# Altium PCB dc_power_backup_module_v1.PcbDoc (part 1 of 4)
Units mil, origin at the board's own origin, x right, y up, seen from the top; angles counter-clockwise.
Board outline 3300 x 2890 mil, 2 copper layers (Top Layer, Bottom Layer); 44 components, 21 nets, 171 pads, 32 vias.
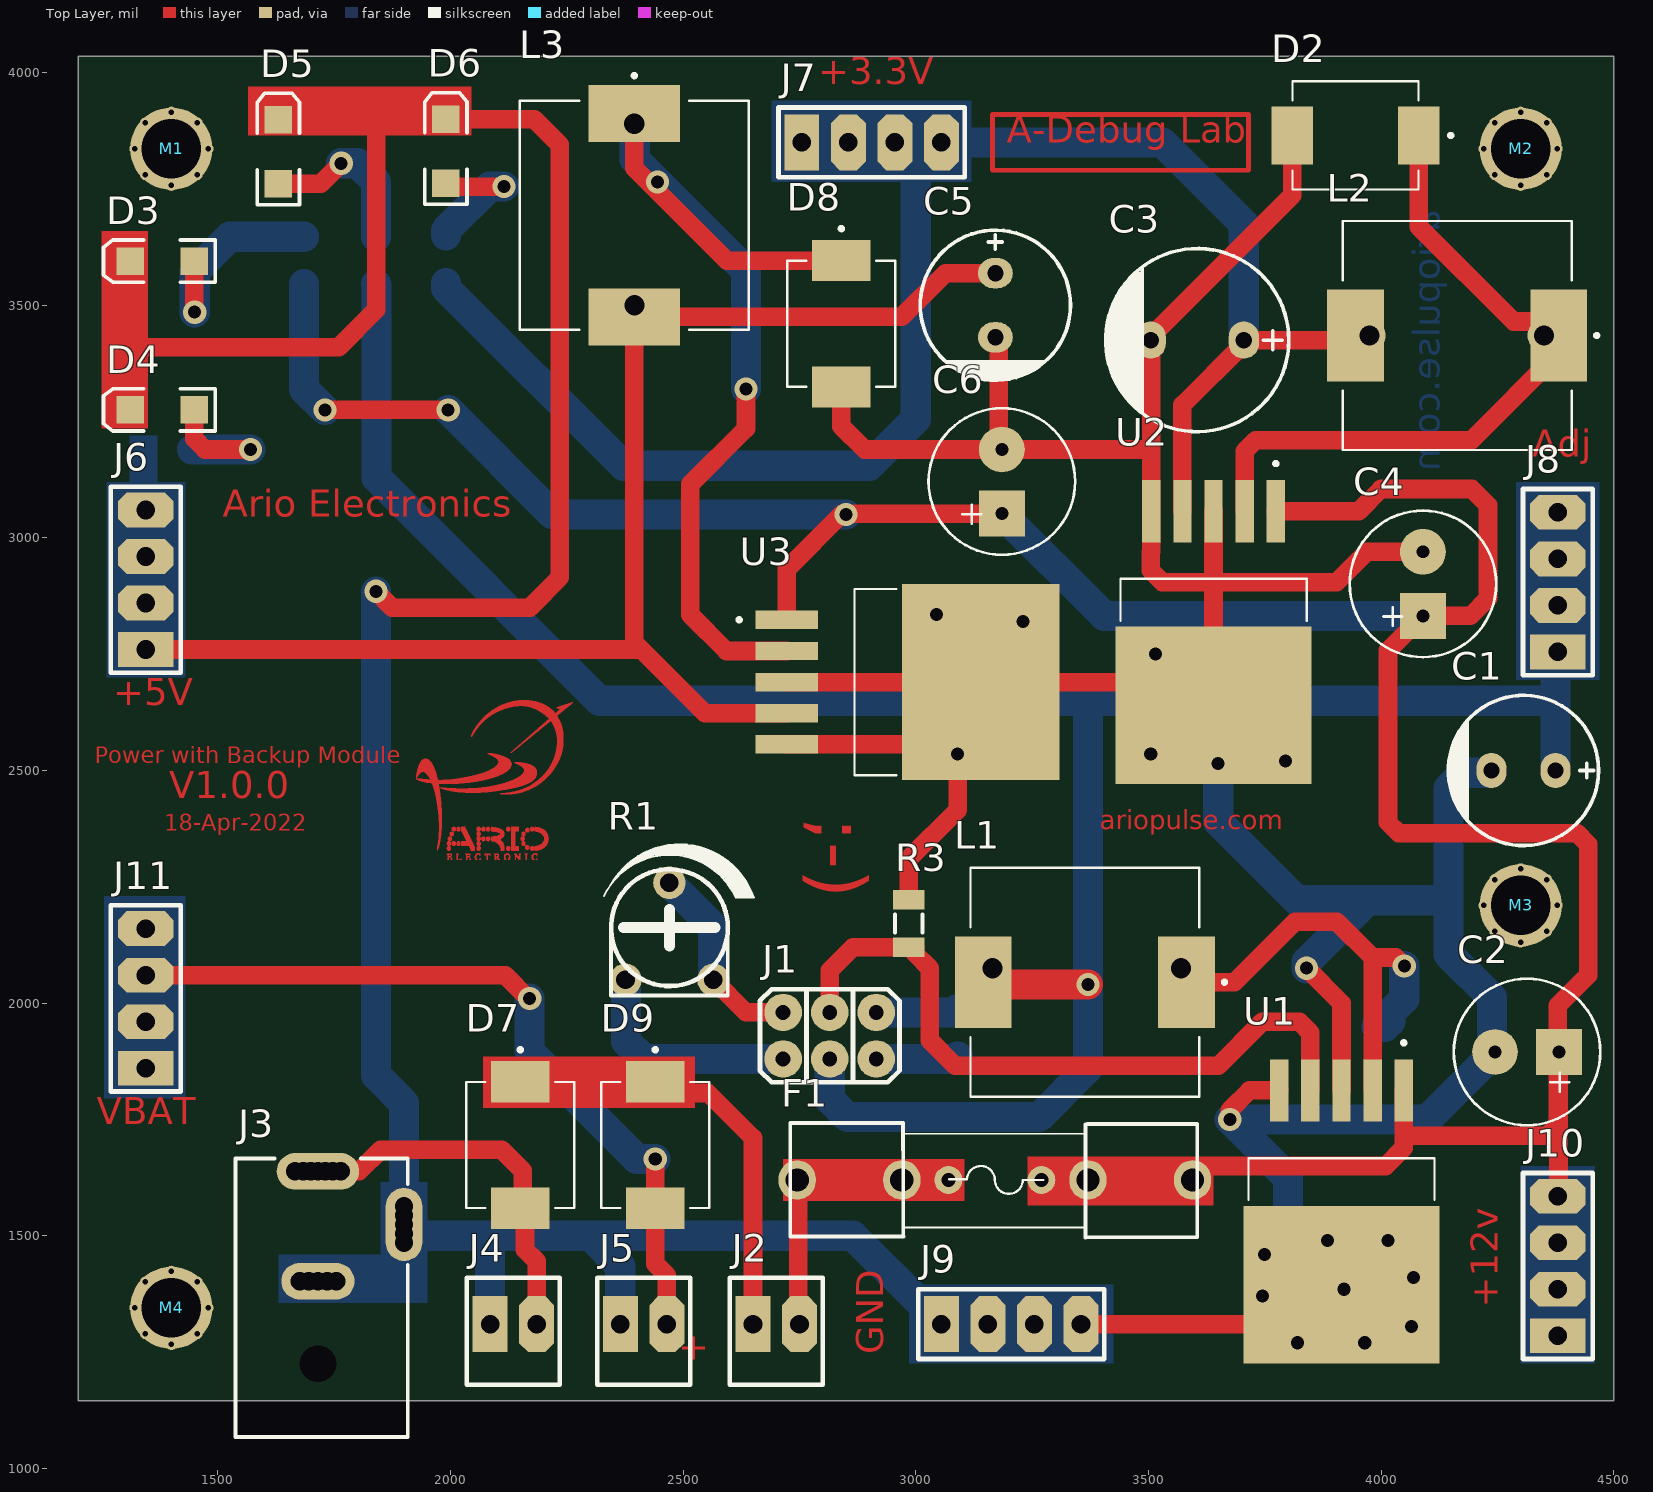
[diagram p0: Top Layer view]
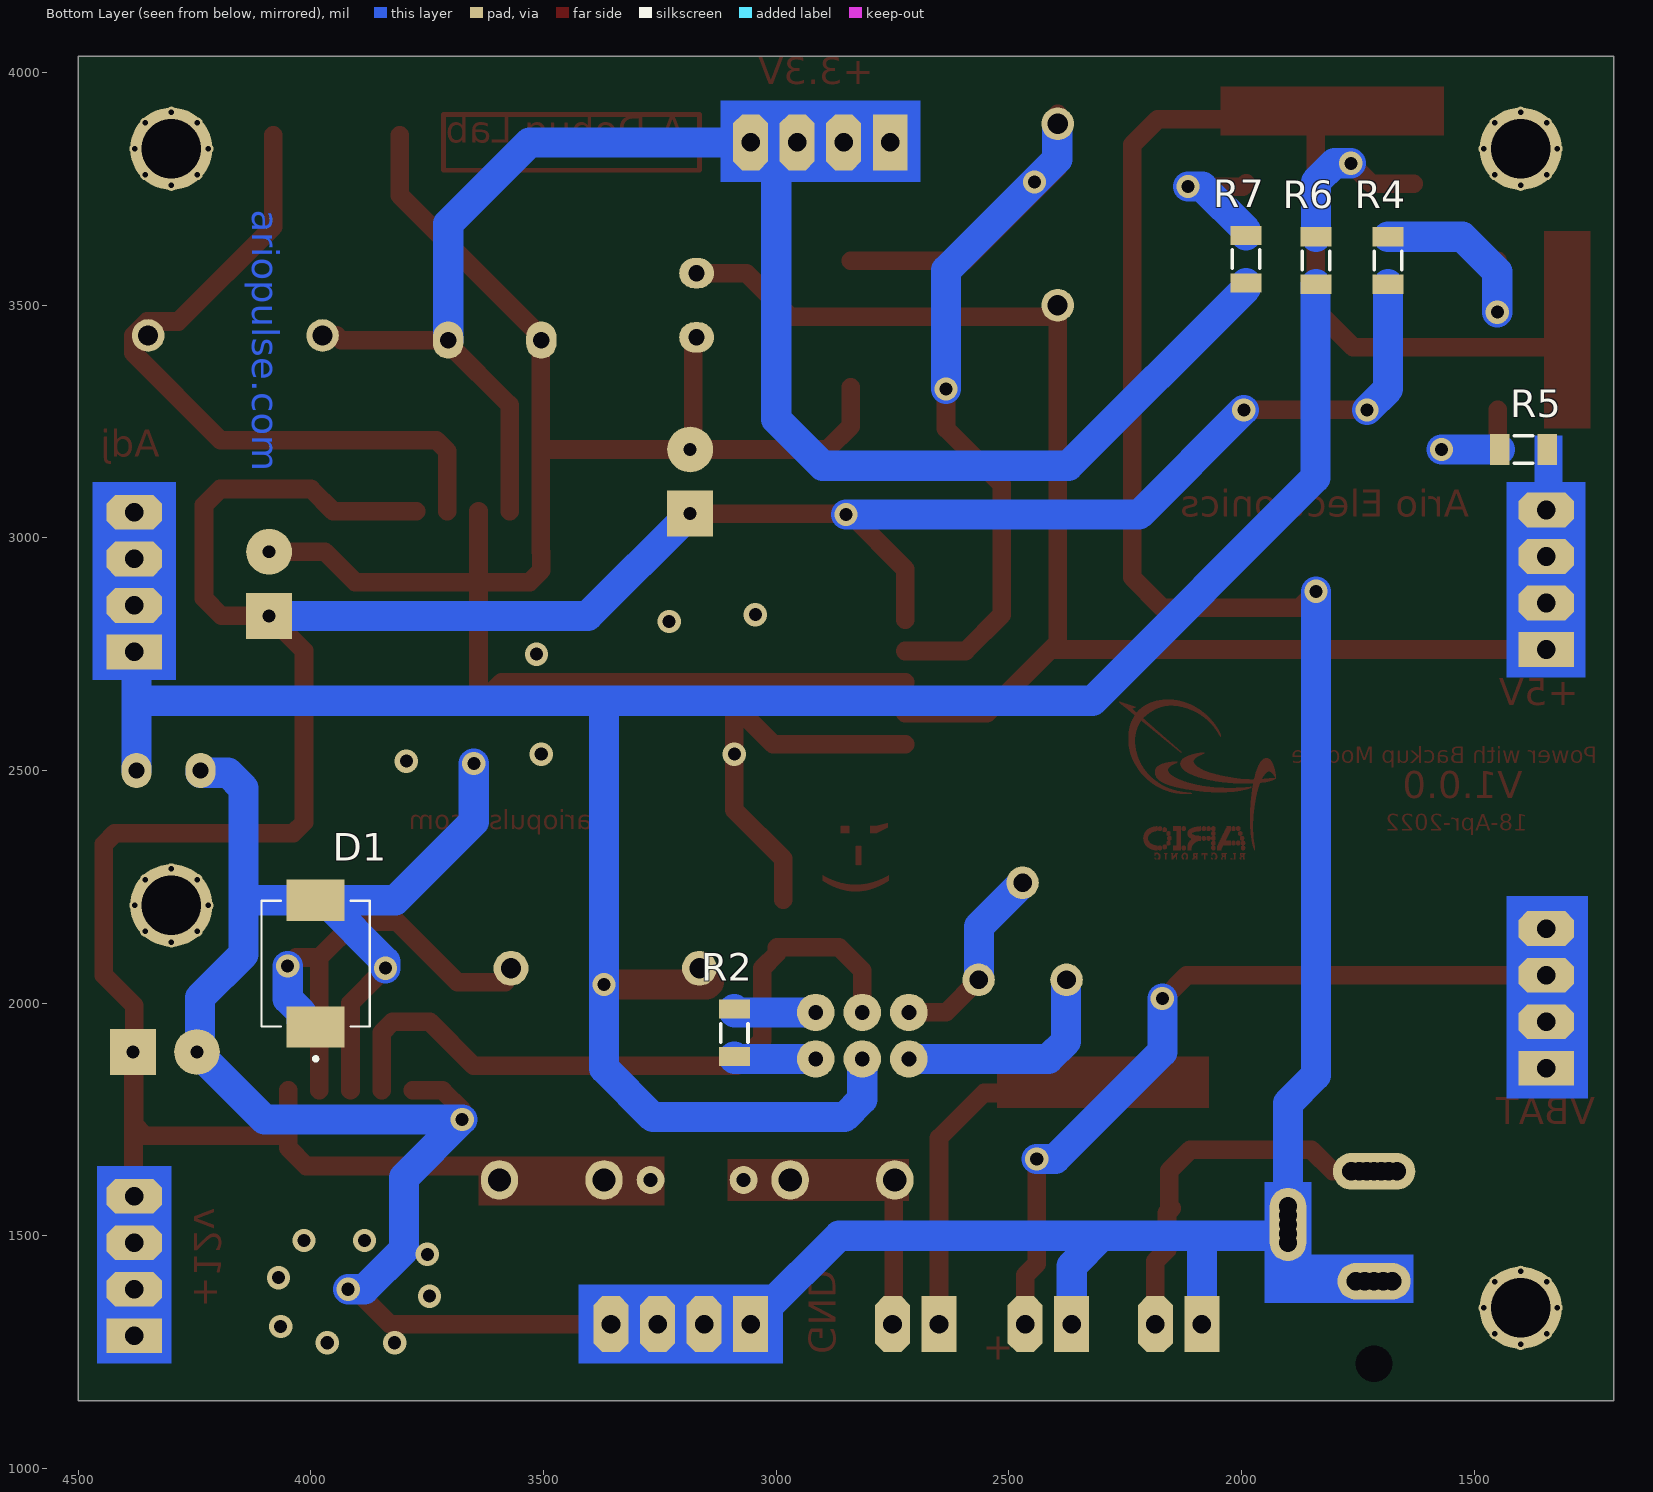
[diagram p1: Bottom Layer view, seen from below]
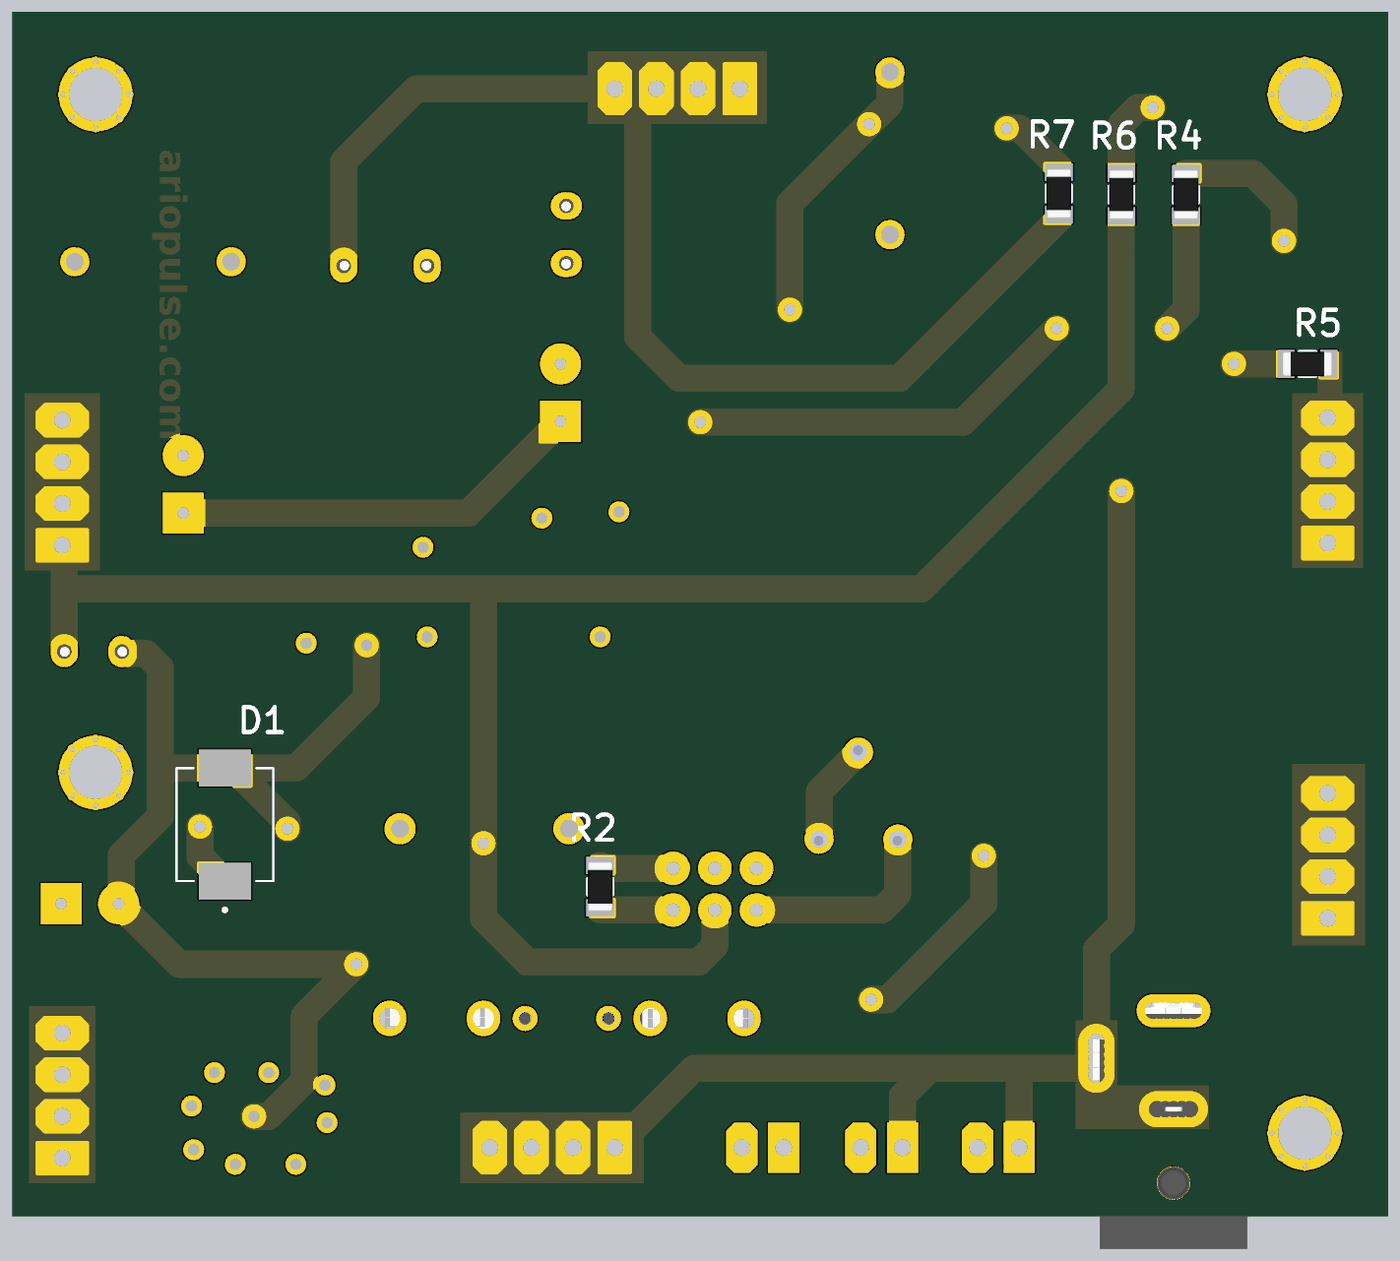
[diagram p5: 3D render of the assembled board from below, using the file's embedded part models]

## Layer stack, top to bottom
Top Solder: solder mask 0.4, Solder Resist, Dk 3.5
Top Layer: signal copper 1.4
Dielectric 1: dielectric 12.6, FR-4, Dk 4.8
Bottom Layer: signal copper 1.4
Bottom Solder: solder mask 0.4, Solder Resist, Dk 3.5

## Board outline
1200,1145 4500,1145 4500,4035 1200,4035

## Design rules (kind name [scope] priority, off if disabled: settings)
Clearance [All] p1: gap=10 ignorepadtopadclearanceinfootprint=FALSE except(0: Arc-Hole Track-Hole SMDPad-Hole THPad-Hole Via-Hole Fill-Hole Poly-Hole Region-Hole Text-Hole)
PolygonConnect [All] p1: connectstyle=Relief reliefconductorwidth=10 reliefentries=4 polygonreliefangle="90 Angle" airgapwidth=10
RoutingVias [All] p1: holewidth=28 width=50 viastyle="Through Hole" minholewidth=28 minwidth=50 maxholewidth=28 maxwidth=50
SolderMaskExpansion [All] p1: expansion=4 istentingtop=FALSE
Width [All] p1: maxlimit=65 minlimit=40 preferedwidth=65 toplayer_prefwidth=40 bottomlayer_minwidth=65 minimp=50.000000 maximp=50.000000 favimp=50.000000
30 further rules are at their usual default settings.

## Components (designator, comment, footprint, x,y, rotation, side; value= is the part's Value field where it differs from the comment)
C1 "Cap Pol2" "Cap 03" 4306.1,2500 r0 top value=680uF
C2 "Cap Pol2" "Cap - 470uF" 4245,1895 r0 top value=100uF
C3 "Cap Pol2" "Cap 04" 3605,3425 r0 top value=1000uF
C4 "Cap Pol2" "Cap - 470uF" 4090,2970 r270 top value=100uF
C5 "Cap Pol2" "Cap 03" 3171.1,3500 r90 top value=680uF
C6 "Cap Pol2" "Cap - 470uF" 3185,3190 r270 top value=100uF
D1 "SS34" DIOM7959X265N 3990,2085 r90 bottom
D2 "SS34" DIOM7959X265N 3945,3865 r180 top
D3 "LED1" "LED SMD 1206" 1380,3595 r180 top
D4 "LED1" "LED SMD 1206" 1380,3275 r180 top
D5 "LED1" "LED SMD 1206" 1630,3830 r90 top
D6 "LED1" "LED SMD 1206" 1990,3831.1 r90 top
D7 "SS34" DIOM7959X265N 2150,1695 r270 top
D8 "SS34" DIOM7959X265N 2840,3460 r270 top
D9 "SS34" DIOM7959X265N 2440,1695 r270 top
F1 "FUSE" "Fuse - Complex" 3170,1620 r0 top
J1 "JUMPER6" JUMP6 2915,1980 r270 top
J2 "KEY" SIP2 2650,1310 r0 top
J3 "DCJ250-10-A_XX-X_REVA" "Power Jack" 1715,1067.52 r90 top
J4 "PowerIn" SIP2 2085,1310 r0 top
J5 "Battery" SIP2 2365,1310 r0 top
J6 "OUT-5v" SIP4 1345,2760 r90 top
J7 "OUT-3.3v" SIP4 2755,3850 r0 top
J8 "OUT-ADJ" SIP4 4380,2755 r90 top
J9 "OUT-GND" SIP4 3055,1310 r0 top
J10 "OUT-12v" SIP4 4380,1285 r90 top
J11 "OUT-BAT" SIP4 1345,1860 r90 top
L1 "68uH" *IND_SRP1265A-330M 3363.5,2045 r180 top
L2 "68uH" *IND_SRP1265A-330M 4163.5,3435 r180 top
L3 "68uH" *IND_SRP1265A-330M 2395,3693.5 r270 top
M1 "Screw" "Board Screw_No Silk" 1400,3836.26 r0 top
M2 "Screw" "Board Screw_No Silk" 4300,3836.26 r0 top
M3 "Screw" "Board Screw_No Silk" 4300,2210 r0 top
M4 "Screw" "Board Screw_No Silk" 1400,1345 r0 top
R1 "POT" "Pot 00" 2470.51,2154.33 r0 top value=50K
R2 "Res-1206" "RES 1206" 3090,1987.2 r270 bottom value=2.7K
R3 "Res-1206" "RES 1206" 2985,2222.2 r270 top value=1.2K
R4 "Res-1206" "RES 1206" 1685,3647.2 r270 bottom value=560
R5 "Res-1206" "RES 1206" 1445,3190 r180 bottom value=220K
R6 "Res-1206" "RES 1206" 1840,3647.2 r270 bottom value=180K
R7 "Res-1206" "RES 1206" 1990,3650 r270 bottom value=100
U1 "LM2576-ADJ" VREG_TPS79625KTTR 3915,1395 r270 top
U2 "LM2576-3.3" VREG_TPS79625KTTR 3640,2640 r270 top
U3 "LM2576-3.3" VREG_TPS79625KTTR 3140,2690 r0 top

## Footprints (in the part's own frame and the unit in brackets; to place one, negate y for a bottom-side part, rotate by r counter-clockwise, add the part's x,y. Pads: shape width x height; smd on the part's side, far side on the other; paste and mask are expansions set on the pad)
*IND_SRP1265A-330M [mm]
  rect 3.1x5 smd: 1(-5.55,0) 2(5.55,0)
  silkscreen extent -7.72,-6.25 6.25,6.25
"Board Screw_No Silk" [mm]
  round 0.6 hole 0.3: S(-2,0) S(-1.414,-1.414) S(-1.414,1.414) S(0,-2) S(0,2) S(1.414,-1.414) S(1.414,1.414) S(2,0)
  round 4.5 hole 3.25 mask+0.1: S(0,0)
"Cap 03" [mil]
  oval 65x75 hole 35: 1(68.9,0) 2(-68.9,0)
  silkscreen extent -161,-161 161,161, body extent -159,-159 157,158, height 473
"Cap 04" [mil]
  oval 65x80 hole 35: 1(100,0) 2(-100,0)
  silkscreen extent -197,-197 197,197, body extent -198,-197 198,199, height 513
"Cap - 470uF" [mm]
  rect 2.5x2.5 hole 0.7: 1(3.5,0)
  round 2.5 hole 0.7: 2(0,0)
  silkscreen extent -2.25,-4 5.75,4
DIOM7959X265N [mm]
  rect 2.25x3.18 smd: A(3.455,0) C(-3.455,0)
  silkscreen extent -5.3,-2.95 3.44,2.95
"Fuse - Complex" [mil]
  oval 80x85 hole 50: 1(-425,0) 1(-200,0) 2(200,0) 2(425,0)
  round 60 hole 30: 1(-100,0) 2(100,0)
  silkscreen extent -440,-124 435,123, body extent -434,-121 436,125, height 378
JUMP6 [mil]
  oval 80x81 hole 32: 1(0,0) 2(100,0) 3(0,-100) 4(100,-100) 5(0,-200) 6(100,-200)
  silkscreen extent -50,-250 150,50
"LED SMD 1206" [mm]
  rect 1.5x1.5 smd: 1(-1.75,0) 2(1.75,0)
  silkscreen extent -2.9,-1.15 3.2,1.15, body extent -1.65,-0.76 1.65,0.69, height 1.36
"Pot 00" [mil]
  round 70 hole 40: 1(-94.49,-104.33) 2(94.49,-104.33) 3(0,104.33)
  silkscreen extent -141,-138 181,187, body extent -125,-144 127,145, height 183
"Power Jack" [mm] "Power Adaptor Jack"
  round 1.5 hole 1: 1(14.5,-1.25) 1(14.5,-0.8) 1(14.5,-0.4) 1(14.5,0.4) 1(14.5,0.8) 1(14.5,1.25) 2(8.5,-1) 2(8.5,1) 2(8.5,-0.5) 2(8.5,0.5) 3(10.6,-4.7) 3(11.1,-4.7) 3(12.1,-4.7) 3(12.6,-4.7)
  oval 2x4.5 hole 1: 1(14.5,0)
  oval 2x4 hole 1: 2(8.5,0)
  oval 4x2 hole 1: 3(11.6,-4.7)
  round 1.9 hole 2: MH(4,0)
  silkscreen extent 0,-4.9 15.2,4.5, body extent 0,-4.9 15.2,4.5, height 11
"RES 1206" [mm] "Chip Resistor, 2-Leads, Body 3.2x1.6mm, IPC High Density _ (0.125 W)"
  rect 1.05x1.7 smd: 1(0,0) 2(2.596,0)
  silkscreen extent 0.8,-0.75 1.8,0.75, body extent -0.23,-0.76 2.82,0.76, height 0.6
SIP2 [mil]
  rect 75x120 hole 40: 1(0,0)
  oct 75x120 hole 40: 2(100,0)
  silkscreen extent -50,-130 150,100
SIP4 [mil]
  rect 75x120 hole 40: 1(0,0)
  oct 75x120 hole 40: 2(100,0) 3(200,0) 4(300,0)
  silkscreen extent -50,-75 350,75
VREG_TPS79625KTTR [mm]
  rect 3.4x1 smd paste-3 mask+0: 1(-10.6,3.4) 2(-10.6,1.7) 3(-10.6,0) 4(-10.6,-1.7) 5(-10.6,-3.4)
  rect 8.6x10.7 smd paste-6 mask+0: 6(0,0)
  silkscreen extent -13.3,-5.08 -4.62,5.08

## Part data
C1 C2 C3 C4 C5 C6: "Polarized Capacitor (Axial)", LatestRevisionDate=17-Jul-2002, LatestRevisionNote="Re-released for DXP Platform.", PackageDescription="Polarized Capacitor; 2 Leads", PackageReference=POLAR0.8, Published=8-Jun-2000, Publisher="Altium Limited"
D1 D2 D7 D8 D9: library part SS34-E3/57T, "Diode Schottky 40V 3A Surface Mount DO-214AB _SMC_", Package="DO-214 Vishay", Availability=Unavailable, MF=Vishay, MP=SS34-E3/57T, Price=None, SnapEDA_Link=https://www.snapeda.com/parts/SS34-E3/57T/Vishay%20Semiconductor%20Diodes%20Division/view-part/104253/?ref=snap
D3 D4 D5 D6: "Typical RED GaAs LED", LatestRevisionDate=08-Jul-2005, LatestRevisionNote="Mech Layer 1 removed.", PackageDescription="LED; 2 Leads", PackageReference=LED-1, Published=8-Jun-2000, Publisher="Altium Limited"
J1: "Ju,per & dip Switch"
J2 J4 J5: library part 2PIN
J3: "Power Barrel Connector Jack 2.55mm ID _0.100_, 5.50mm OD _0.217_ Through Hole, Right Angle", Package=None, Availability=Unavailable, MF="Global Connector Technology", MP=DCJ250-10-A-K1-K, Price=None, SnapEDA_Link=https://www.snapeda.com/parts/DCJ250-10-A-K1-K/Global%20Connector%20Technology/view-part/813036/?ref=snap
J6 J7 J8 J9 J10 J11: library part 4PIN
L1 L2 L3: library part SRP1265A-330M, "Inductor Power Shielded Wirewound 33uH 20% 100KHz Carbonyl Powder 8A 58mOhm DCR Automotive T/R", Package="1008 Bourns", Availability=Unavailable, MF=Bourns, MP=SRP1265A-330M, Price=None, SnapEDA_Link=https://www.snapeda.com/parts/SRP1265A-330M/Bourns/view-part/?ref=snap
M1 M2 M3 M4: library part "Board Screw", "Board Screw With Spacer"
R1: library part RPot, "Volume Potentiometer", LatestRevisionDate=17-Jul-2002, LatestRevisionNote="Re-released for DXP Platform.", PackageDescription="Variable Resistor, Thru-Hole; 3 Leads", PackageReference=VR5, Published=8-Jun-2000, Publisher="Altium Limited", Set Position=0.5, Sim Note="Enter the Resistance value and the set point into parameter fields."
R2 R3 R4 R5 R6 R7: "Resistor", LatestRevisionDate=17-Jul-2002, LatestRevisionNote="Re-released for DXP Platform.", PackageDescription="Axial Device, Thru-Hole; 2 Leads; 0.3 in Pin Spacing", PackageReference=AXIAL-0.3, Published=8-Jun-2000, Publisher="Altium Limited"
U1 U2 U3: library part LM2576HVS-ADJ/NOPB, "SWITCHER Ø³Ø§Ø¯Ù‡ Ùˆ regØ› ØªÙ†Ø¸ÛŒÙ… Ú©Ù†Ù†Ø¯Ù‡ Ú¯Ø§Ù… Ø¨Ù‡ Ù¾Ø§ÛŒÛŒÙ† ØªØ¹Ø¯Ø§Ø¯ 4 ÙˆÙ„Øª ØªØ§ 60 ÙˆÙ„Øª ØŒ 3A Ú©Ù… Ú©Ø§Ù…Ù¾ÙˆÙ†Ù†Øª 5-DDPAK / TO-263 -40 ØªØ§ 125", Package="TO-263-5 Texas Instruments", Availability=Unavailable, BuyPart=https://www.snapeda.com/parts/LM2576HVS-ADJ/NOPB/Texas%20Instruments/view-part/213619/?ref=eda, MF="Texas Instruments", MP=LM2576HVS-ADJ/NOPB, Price=None, SnapEDA_Link=https://www.snapeda.com/parts/LM2576HVS-ADJ/NOPB/Texas%20Instruments/view-part/213619/?ref=snap, Texas_Instruments-Purchase-URL=https://snapeda.com/shop?store=Texas+Instruments&id=213619

## Free pads (board coordinates)
  round 75 hole 43.31: 8(3165,2075) 9(3570,2075)
  round 70 hole 43.2: 10(2395,3500) 12(3975,3435) 13(4350,3435)
  round 70 hole 43.31: 11(2395,3890)

## Via types
v1: diameter 50, hole 28, Top Layer to Bottom Layer, 32 vias

## Nets (pads, with @x,y where several pads share a name; then routed paths per layer and width w, separated by ;. In a path a pad name is that pad's centre, name@x,y a point inside that pad or via, vN(x,y) a via of type N, cw(c..) or ccw(c..) an arc to the next point about the centre after c; other vN are vias at no path point)
+3.3V: C3.1 J7.1 J7.2 J7.3 J7.4 L2.2 pad.12 R7.2 U2.4 | length 3399.4
  Top Layer w40: U2.4@3573.07,3057.32 3573.07,3285.57 3705,3417.5 C3.1@3705,3425 3935,3425 L2.2@3945,3435
  Bottom Layer w65: R7.2@1990,3547.8 1990,3536.93 2371.93,3155 2900,3155 3000,3255 3000,3795 ; J7.4@3055,3850 3530,3850 3705,3675 C3.1@3705,3425
+5V: C5.1 J6.1 J6.2 J6.3 J6.4 L3.2 pad.10 R5.2 U3.4 | length 2970.6
  Top Layer w40: J6.1@1345,2760 2410,2760 ; U3.4@2722.68,2623.07 2546.93,2623.07 2410,2760 ; C5.1@3171.1,3568.9 3063.9,3568.9 2970,3475 L3.2@2395,3475 2395,2775 2410,2760
+12V: C2.1 C4.1 C6.1 F1.2 J10.1 J10.2 J10.3 J10.4 R4.2 U1.1 U2.1 U3.1 | length 6734.4
  Top Layer w40: v1(1730,3275) v1(1995,3275) ; U3.1@2722.68,2823.86 2722.68,2932.68 2842.2,3052.2 C6.1@3185,3052.2 ; 3625,1650 4010,1650 4048.86,1688.86 4048.86,1715 ; U2.1@3773.86,3057.32 3952.32,3057.32 4000,3105 4195,3105 4230,3070 4230,2870 4192.2,2832.2 C4.1@4090,2832.2 4015,2757.2 4015,2388.43 4038.43,2365 4421.57,2365 4445,2341.57 4445,2060 4380,1995 C2.1@4380,1892.2 ; U1.1@4048.86,1812.32 4048.86,1715 ; J10.4@4380,1585 4381.4,1586.4 4381.4,1893.6 C2.1@4380,1892.2 ; 4048.86,1715 4356.57,1715 4380,1738.43 C2.1@4380,1892.2
  Bottom Layer w65: R4.2@1685,3545 1685,3320 v1(1730,3275) ; v1(1995,3275) 2220,3050 v1(2850,3050) ; C6.1@3185,3052.2 3405,2832.2 C4.1@4090,2832.2
GND: C1.2 C2.2 C3.2 C4.2 C5.2 C6.2 D1.A D2.A D3.2 D4.2 D5.2 D6.2 D8.A J3.2 J3.3 J4.1 J5.1 J9.1 J9.2 J9.3 J9.4 R3.1 U1.3 U1.5 U1.6 U2.3 U2.5 U2.6 U3.3 U3.5 U3.6 | length 14436.1
  Top Layer w40: 1295,3410 1760,3410 1840,3490 1840,3885 1860,3905 ; v1(1840,2885) 1875,2850 2170,2850 2235,2915 2235,3845 2180,3900 D6.2@1990,3900 ; U3.5@2722.68,2556.14 3006.14,2556.14 U3.6@3090,2640 ; U3.3@2722.68,2690 U3.6@3140,2690 ; D8.A@2840,3323.98 2840,3240 2890,3190 C6.2@3185,3190 ; R3.1@2985,2222.2 2985,2310 3090,2415 U3.6@3090,2640 ; C5.2@3171.1,3431.1 3178.05,3424.15 3178.05,3196.95 C6.2@3185,3190 ; J9.4@3355,1310 3830,1310 U1.6@3912.5,1392.5 ; U2.3@3640,3057.32 3640,2905 ; v1(3675,1750) 3675,1770 3717.32,1812.32 U1.5@3781.14,1812.32 ; D2.A@3808.98,3865 3808.98,3736.48 3505,3432.5 C3.2@3505,3425 3505.83,3424.17 3505.83,3190 ; v1(3840,2075) 3915,2000 U1.3@3915,1812.32 ; C4.2@4090,2970 3970,2970 3905,2905 3640,2905 ; U3.6@3090,2640 U3.6@3140,2690 ; U3.6@3140,2690 3590,2690 U2.6@3640,2640 3640,2905 ; C6.2@3185,3190 3505.83,3190 ; 3505.83,3190 3505.83,3057.64 U2.5@3506.14,3057.32 3505.83,3057.01 3505.83,2970.39 3505,2969.57 3505,2930 3530,2905 3640,2905
  Bottom Layer w65: v1(1840,2885) 1840,1845 1900,1785 1900,1524.25 J3.3@1900.04,1524.21 ; J3.3@1900.04,1484.84 1915.2,1500 2090,1500 ; J4.1@2085,1310 2085,1495 2090,1500 ; J5.1@2365,1310 2365,1435 2300,1500 ; J9.1@3055,1310 3055,1332.5 3050,1337.5 3027.5,1337.5 2865,1500 2300,1500 ; v1(3650,2515) 3650,2390 3818.98,2221.02 D1.A@3971.69,2221.02 ; v1(3840,2075) 3840,2089.33 D1.A@3971.69,2221.02 ; v1(3920,1385) 3885,1385 3800,1470 3800,1625 v1(3675,1750) 4100,1750 C2.2@4245,1895 4238.6,1901.4 4238.6,2011.4 4145,2105 4145,2235 ; C1.2@4237.2,2500 4237.2,2495 4178.08,2495 4145,2461.92 4145,2235 ; 2090,1500 2300,1500 ; D1.A@3971.69,2221.02 D1.A@3990,2221.02 4131.02,2221.02 4145,2235
  other v1: 3820,1270 3965,1270 4065,1305 3745,1370 4070,1410 3750,1460 3885,1490 4015,1490 3795,2520 3090,2535 3505,2535 3515,2750 3230,2820 3045,2835
NetD1_C: D1.C L1.1 pad.9 U1.2 | length 1013.5
  Top Layer w40: L1.1@3582.01,2045 3685,2045 3815,2175 3905,2175 3981.93,2098.07 ; U1.2@3981.93,1812.32 3981.93,2098.07 ; v1(4050,2080) 4031.93,2098.07 3981.93,2098.07
  Bottom Layer w65: D1.C@3990,1948.98 4008.31,1948.98 4020.1,1960.77 4020.1,1979.07 4050,2008.98 v1(4050,2080)
NetD2_C: D2.C L2.1 pad.13 U2.2 | length 1523.1
  Top Layer w40: U2.2@3706.93,3057.32 3706.93,3186.57 3730.36,3210 4194.41,3210 4382.01,3397.6 L2.1@4382.01,3435 4352.01,3465 4285,3465 4081.02,3668.98 D2.C@4081.02,3865
NetD3_1: D3.1 R4.1 | length 463.6
  Top Layer w40: D3.1@1448.9,3595 1448.9,3486.1 v1(1450,3485)
  Bottom Layer w65: v1(1450,3485) 1450,3571.92 1525.28,3647.2 R4.1@1685,3647.2
NetD4_1: D4.1 R5.1 | length 317.4
  Top Layer w40: D4.1@1448.9,3275 1448.9,3213.43 1472.33,3190 v1(1570,3190)
  Bottom Layer w65: R5.1@1445,3190 v1(1570,3190)
NetD5_1: D5.1 R6.1 | length 362.5
  Top Layer w40: D5.1@1630,3761.1 1721.1,3761.1 v1(1765,3805)
  Bottom Layer w65: v1(1765,3805) 1800,3805 1840,3765 R6.1@1840,3647.2
NetD6_1: D6.1 R7.1 | length 302.8
  Top Layer w40: D6.1@1990,3762.2 1997.2,3755 v1(2115,3755)
  Bottom Layer w65: R7.1@1990,3650 1990,3660.87 2084.13,3755 v1(2115,3755)
NetD7_A: D7.A J3.1 J4.2 | length 856
  Top Layer w40: J3.1@1683.5,1638.39 J3.1@1699.25,1638.39 J3.1@1715,1638.39 J3.1@1730.75,1638.39 J3.1@1746.5,1638.39 J3.1@1764.21,1638.39 1803.39,1638.39 1850,1685 2110,1685 2155,1640 2155,1563.98 D7.A@2150,1558.98 2160,1548.98 2160,1470 2185,1445 J4.2@2185,1310
NetD8_C: D8.C L3.1 pad.11 U3.2 | length 2088.6
  Top Layer w40: L3.1@2395,3912.01 pad.11@2395,3890 2395,3795 2593.98,3596.02 D8.C@2840,3596.02 ; v1(2635,3320) 2635,3235 2515,3115 2515,2835 2593.07,2756.93 U3.2@2722.68,2756.93
  Bottom Layer w65: pad.11@2395,3890 2395.96,3889.04 2395.96,3814.04 2635,3575 v1(2635,3320)
  other v1: 2445,3765
NetF1_1: F1.1 J2.2 | length 312.1
  Top Layer w40: F1.1@2745,1620 2747.5,1617.5 2747.5,1312.5 J2.2@2750,1310
NetJ1_1: J1.1 R2.1 | length 181.6
  Bottom Layer w65: J1.1@2915,1980 3089.04,1980 3090,1980.96 R2.1@3090,1987.2
NetJ1_2: J1.2 R2.2 | length 179.4
  Bottom Layer w65: J1.2@2915,1880 3089.04,1880 3090,1880.96 R2.2@3090,1885
NetJ1_3: J1.3 R3.2 U1.4 | length 1521
  Top Layer w40: J1.3@2815,1980 2815,2070 2865,2120 R3.2@2985,2120 2997.8,2120 2998.46,2119.33 2998.46,2106.54 3030,2075 3030,1920 3085,1865 3650,1865 3745,1960 3824.64,1960 3848.07,1936.57 U1.4@3848.07,1812.32
NetJ1_5: J1.5 R1.2 R1.3 | length 426.8
  Top Layer w40: R1.2@2565,2050 2635,1980 J1.5@2715,1980
  Bottom Layer w65: R1.3@2470.51,2258.66 2470.51,2258.34 2564.04,2164.81 2564.04,2050.96 R1.2@2565,2050
NetJ1_6: J1.6 R1.1 | length 486.1
  Bottom Layer w65: R1.1@2376.02,2050 2376.98,2049.04 2376.98,1918.02 2415,1880 J1.6@2715,1880
VADJ: C1.1 J1.4 J8.1 J8.2 J8.3 J8.4 L1.2 pad.8 R6.2 | length 5126.2
  Top Layer w65: L1.2@3145,2045 3150,2040 v1(3370,2040)
  Bottom Layer w65: R6.2@1840,3545 1840.96,3544.04 1840.96,3129.04 2320,2650 3375,2650 ; J1.4@2815,1880 2815,1793.08 2853.08,1755 3265,1755 3370,1860 v1(3370,2040) 3370,2645 3375,2650 ; C1.1@4375,2500 4375,2650 ; J8.1@4380,2755 4375,2750 4375,2650 ; 3375,2650 4375,2650
VBAT: D9.A J5.2 J11.1 J11.2 J11.3 J11.4 | length 1691.3
  Top Layer w40: J11.3@1345,2060 2117.29,2060 2167.29,2010 v1(2170,2010) ; v1(2440,1665) D9.A@2440,1558.98 2440,1440 2465,1415 J5.2@2465,1310
  Bottom Layer w65: v1(2170,2010) 2170,1895 2400,1665 v1(2440,1665)
VIN: D7.C D9.C J2.1 | length 660.1
  Top Layer w40: D9.C@2440,1831.02 2464.29,1806.73 2553.27,1806.73 2650,1710 J2.1@2650,1310
pads on no net: J3.MH M1.S M2.S M3.S M4.S
copper on no net: | length 58846.1